# EAGLE board piezo-preamp-tickler_V3-4_single-supply-OPA1642_backup (EAGLE 8.5.0)
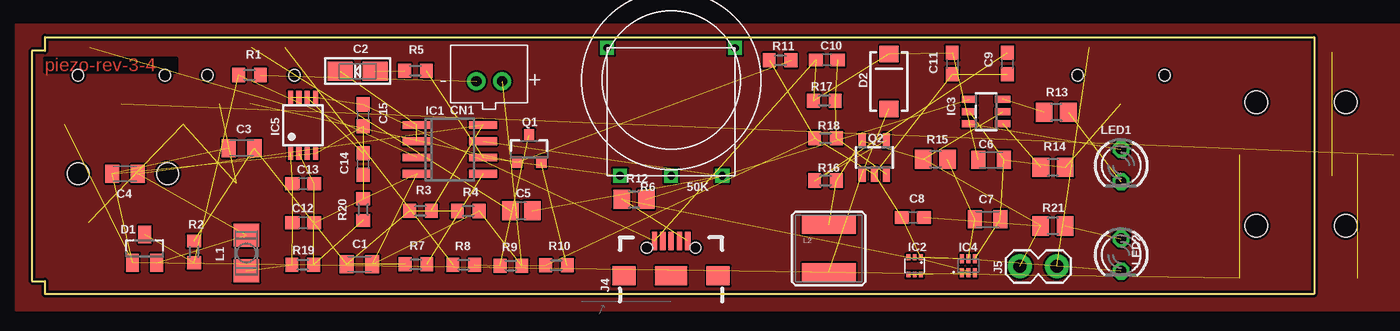
[diagram p0: board, top side]
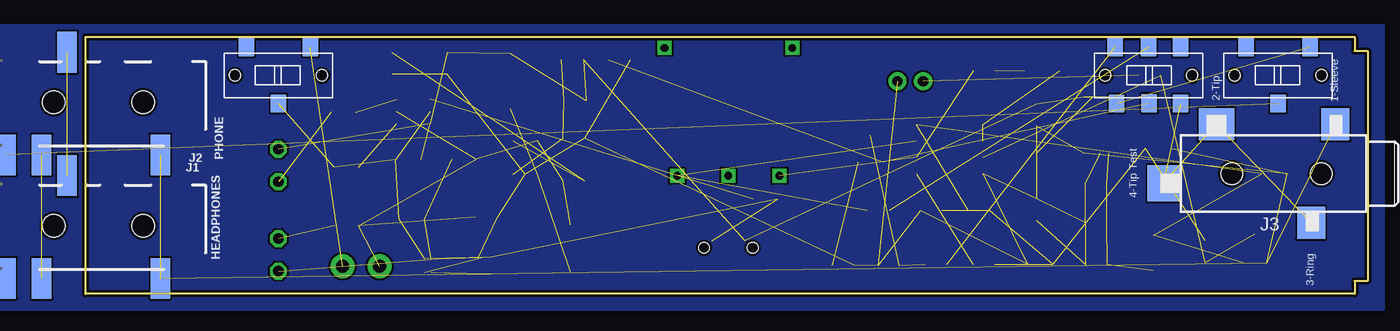
[diagram p1: board, bottom side, seen from below]

Size 100.3 x 20.07 mm. Coordinates in mm from the lower left corner, seen from the top.
Outline: 0,19 0,1 1.02,1 1.02,0 100.3,0 100.3,20.07 1,20.07 1,19 0,19
Copper layers (1*16): Top 0.035mm / dielectric 1.5mm / Bottom 0.035mm
Design rules "default *": minimum track width 6mil, minimum drill 0.35mm, track to track 6mil, track to pad 6mil, pad to pad 6mil, via to via 6mil, smd to smd 6mil, copper to edge 8mil, drill to drill 6mil, minimum pad ring 10mil, minimum via ring 8mil, stop-mask expansion 4mil, vias tented up to drill 20mil, thermal gap 10mil

## Footprints (pad centres in the part's own frame; a part is rotated, then mirrored left to right if it is on the bottom)
C0805K = smd 1.1 x 1.4: 1 -1,0; 2 1,0
EIA3216-18/A-R = smd 1.95 x 1.5: + 1.375,0; - -1.375,0
C0805 = smd 1.3 x 1.5: 1 -0.85,0; 2 0.85,0
C0603 = smd 1.1 x 1: 1 -0.85,0; 2 0.85,0
JST-PH-2-THM = drill 0.8 pad 1.422: 1 1,0; 2 -1,0
SOT23 = smd 1 x 1.4: 1 -0.95,-1.1; 2 0.95,-1.1; 3 0,1.1
SMA-DIODE = smd 1.27 x 1.47: A -2.15,0; C 2.15,0
SO08 = smd 0.6 x 2.2: 1 -1.905,-2.6; 2 -0.635,-2.6; 3 0.635,-2.6; 4 1.905,-2.6; 5 1.905,2.6; 6 0.635,2.6; 7 -0.635,2.6; 8 -1.905,2.6
SOT-563 = smd 0.3 x 0.45: 1 -0.5,-0.675; 2 0,-0.675; 3 0.5,-0.675; 4 0.5,0.675; 5 0,0.675; 6 -0.5,0.675
SOT23-6 = smd 0.55 x 1.2: 1 -0.95,-1.3; 2 0,-1.3; 3 0.95,-1.3; 4 0.95,1.3; 5 0,1.3; 6 -0.95,1.3
WSON-6 = smd 0.3 x 0.7: 1 -0.5,-0.55; 2 0,-0.55; 3 0.5,-0.55; 4 0.5,0.55; 5 0,0.55; 6 -0.5,0.55
MSOP-8 = smd 0.4 x 1: 1 -0.975,-2.2; 2 -0.325,-2.2; 3 0.325,-2.2; 4 0.975,-2.2; 5 0.975,2.2; 6 0.325,2.2; 7 -0.325,2.2; 8 -0.975,2.2
TRRS_SJ-43514-SMT-TR = smd 1.524 x 3.175: EARTH -7.067,-4.128; RING1 -2.309,3.901; RING2 -4.293,-4.128; TIP 4.995,-4.128 | hole 1.778: -3.353,-0.007; 3.647,-0.007
TRS_SJ-3524-SMT = smd 2.5 x 2.2: 1 3.85,-4.6; 3 -3.85,-2.7 | smd 2.5 x 2.8: 2 3.85,4.7 | smd 2.8 x 2.5: 4 -0.75,8.85 | hole 1.7: 0,-3.5; 0,3.5
USB-B-MICRO-SMD_RED_PASTE = smd 1.45 x 0.4: D+ 2.725,0; D- 2.725,0.65; GND 2.725,-1.3; ID 2.725,-0.65; VBUS 2.725,1.3 | smd 1.5 x 1.8: SHIELD1 0,3.685; SHIELD2 0,-3.685 | smd 1.5 x 2.5: SHIELD3 0,0 | hole 0.85: 2.2,1.9; 2.2,-1.9
1X02_LOCK = drill 1.016 pad 1.88: 1 -0.178,0; 2 2.718,0
L3225P = smd 1.8 x 2: 1 -1.4,0; 2 1.4,0
CR54 = smd 4.2 x 1.4: P$1 0,1.85; P$2 0,-1.85
LED3MM = drill 0.813 octagon: A -1.27,0; K 1.27,0
SOT23-3 = smd 0.8 x 0.9: 1 -0.95,-1; 2 0.95,-1; 3 0,1.1
SOT23-5 = smd 0.55 x 1.2: 1 -0.95,-1.3; 2 0,-1.3; 3 0.95,-1.3; 4 0.95,1.3; 5 -0.95,1.3
R0603 = smd 1 x 1.1: 1 -0.85,0; 2 0.85,0
POT-THUMB-14MM_ALPHA-RV100F-30-4K1B-B10K-B301 = drill 0.6 square: P$1 -4,-7.5; P$2 0,-7.5; P$3 4,-7.5; P$4 -5,2.5; P$5 5,2.5
R0805 = smd 1.3 x 1.5: 1 -0.95,0; 2 0.95,0
SWITCH_DPDT_CL-SB-22B = smd 1.2 x 1.4: 1 -2.5,-2.2; 2 0.05,-2.17; 3 2.5,-2.2; 4 -2.63,2.2; 5 0,2.2; 6 2.51,2.2 | hole 0.9: -3.4,0; 3.4,0
SWITCH_SPDT_CL-SB-12B = smd 1.2 x 1.4: P$1 -2.5,-2.2; P$2 0,2.2; P$3 2.5,-2.2 | hole 0.9: -3.4,0; 3.4,0

## Placement (x,y rotation side)
C1  10uF  [C0805K]  25.62,2.31 0 top
C2  100uF  [EIA3216-18/A-R]  25.48,17.41 180 top
C3  0.1uF  [C0805K]  16.4,11.4 180 top
C4  0.1uF  [C0805K]  7.29,9.38 180 top
C5  10uF  [C0805]  38.28,6.5 180 top
C6  10uF  [C0805K]  75.04,10.47 0 top
C7  0.1uF  [C0805K]  74.77,5.82 0 top
C8  10uF  [C0603]  68.91,5.97 180 top
C9  56nf  [C0603]  76.31,18 270 top
C10  2.2pf  [C0603]  62.18,18.29 0 top
C11  68uF  [C0603]  71.99,18 270 top
C12  10uF  [C0603]  21.23,5.56 0 top
C13  10nF  [C0603]  21.23,8.6 0 top
C14  10nF  [C0603]  25.91,10.14 270 top
C15  10uF  [C0603]  25.91,13.95 270 top
CN1  [JST-PH-2-THM]  35.77,16.62 0 top
D1  BAT54S  [SOT23]  8.81,3.54 0 top
D2  10BQ015  [SMA-DIODE]  67.04,16.61 90 top
IC1  OPA1642  [SO08]  32.68,11.3 270 top
IC2  DMN2400  [SOT-563]  69.06,2.19 180 top
IC3  BQ21040  [SOT23-6]  74.64,14.25 90 top
IC4  BQ297X  [WSON-6]  73.25,2.19 0 top
IC5  TPS7A49  [MSOP-8]  21.21,13.18 0 top
J1  HEADPHONES  [TRRS_SJ-43514-SMT-TR]  99.43,5.33 0 bottom
J2  PHONE  [TRRS_SJ-43514-SMT-TR]  99.43,14.99 0 bottom
J3  Mixer  [TRS_SJ-3524-SMT]  7.11,9.4 90 bottom
J4  [USB-B-MICRO-SMD_RED_PASTE]  50,1.41 90 top
J5  Battery  [1X02_LOCK]  77.47,2.15 0 top
L1  100uH  [L3225P]  16.78,3.19 90 top
L2  2.7uH  [CR54]  62.34,3.56 0 top
LED1  [LED3MM]  85.2,10.03 270 top
LED2  [LED3MM]  85.2,3.05 270 top
Q1  MMBFJ201  [SOT23-3]  38.9,11.3 0 top
Q2  SC4503  [SOT23-5]  65.9,10.67 0 top
R1  100K  [R0603]  17.03,17.11 180 top
R2  10M  [R0603]  12.68,3.28 270 top
R3  100K  [R0603]  30.39,6.48 0 top
R4  100K  [R0603]  34.13,6.48 180 top
R5  220  [R0603]  30,17.44 0 top
R6  50K  [POT-THUMB-14MM_ALPHA-RV100F-30-4K1B-B10K-B301]  50,16.73 0 top
R7  220  [R0603]  30.04,2.31 180 top
R8  1K  [R0603]  33.78,2.26 180 top
R9  1M  [R0603]  37.47,2.2 180 top
R10  1.2K  [R0603]  41.02,2.24 0 top
R11  2.2K  [R0603]  58.53,18.26 0 top
R12  10k  [R0805]  47.09,7.39 0 top
R13  1k  [R0805]  80.12,14.19 180 top
R14  10k  [R0805]  79.88,9.88 180 top
R15  330  [R0805]  70.68,10.53 0 top
R16  15k  [R0603]  62.09,8.86 0 top
R17  1M  [R0603]  61.99,15.11 180 top
R18  100k  [R0603]  62.09,12.16 0 top
R19  91.2k  [R0603]  21.19,2.27 0 top
R20  100k  [R0603]  25.91,6.59 90 top
R21  390  [R0805]  79.87,5.3 180 top
SW1  SWITCH_DPDT  [SWITCH_DPDT_CL-SB-22B]  17.13,17.08 0 bottom
SW2  INPUT-select  [SWITCH_SPDT_CL-SB-12B]  7,17.08 180 bottom
SW3  SPDT  [SWITCH_SPDT_CL-SB-12B]  85.2,17.08 180 bottom

## Library data of the parts
C1 C3-C15 CN1 = adafruit
C2 = microbuilder
D1 = diode
D2 = SparkFun
IC1 = linear
IC2-IC5 J1-J3 Q1 Q2 R1-R21 SW1-SW3 = CMU-ArtFab
J4 = SparkFun-Connectors; PROD_ID: CONN-11752
J5 = SparkFun-Connectors; G: -; V: +
L1 = rcl; SPICEPREFIX: L
L2 = SparkFun-Passives
LED1 LED2 = led

## Nets
+12V: C12.1 C13.1 IC5.1 L1.1 R19.1
GND: C1.2 C3.2 C4.2 C8.2 C9.2 C11.2 C12.2 C14.2 C15.2 CN1.1 D1.1 IC1.4 IC2.1 IC4.6 IC5.4 J1.TIP J2.TIP J3.1 LED2.K Q2.2 R4.1 R9.1 R10.1 R11.1 R18.1 R20.2
GND2: C6.2 C7.2 IC2.3 IC3.5 IC4.4 J4.GND R12.1 R14.1 SW3.P$2
N$2: CN1.2 R1.1
N$3: Q1.2 R10.2
N$4: J1.EARTH
N$5: IC1.5 R7.1
N$6: C5.1 IC1.7 R6.P$3
N$7: IC1.6 R5.2 R6.P$1
N$9: D1.3 IC1.3 R1.2 R2.2
N$10: Q1.3 R8.1 R9.2
N$11: R8.2 SW1.4
N$12: J3.2 J3.3 J3.4 SW1.3
N$13: J1.RING1 J2.RING1
N$14: C2.- R5.1
N$15: J1.RING2 J2.RING2
N$16: C5.2 SW1.5
N$17: J2.EARTH SW2.P$2
N$18: LED2.A R21.1
N$19: SW1.1 SW2.P$1
N$20: J5.2 SW3.P$1
N$22: LED1.K R13.1
N$23: C1.1 C3.1 R2.1 R3.1 R4.2 R7.2
N$24: C2.+ IC1.1 IC1.2
N$25: C4.1 D1.2 IC1.8 L1.2 R3.2
N$26: C13.2 IC5.2 R19.2 R20.1
N$27: IC3.3 R13.2
N$28: C14.1 IC5.6
N$29: C9.1 Q2.4 R16.1
N$30: C10.2 Q2.3 R17.1 R18.2
N$31: IC3.1 R14.2
N$32: D2.A L2.P$2 Q2.1
N$36: IC3.4 R12.2
N$42: C7.1 IC4.5 R15.2
N$43: IC2.4 IC2.6
N$44: IC2.5 IC4.2
N$45: IC2.2 IC4.3
SELECT: Q1.1 R11.2 SW1.2
V+: C6.1 C10.1 C11.1 C15.1 D2.C IC3.6 IC5.5 IC5.8 J4.VBUS LED1.A R17.2
VBAT: C8.1 IC3.2 J5.1 L2.P$1 Q2.5 R15.1 R16.2 R21.2

## Tracks (layer width: path | path; a pad name or v marks a point on that pad's centre or on a via)
+12V  (4 unrouted)
GND  (25 unrouted)
GND2  (8 unrouted)
N$2  (1 unrouted)
N$3  (1 unrouted)
N$4
  pour Top: -1.27,21.05 -1.27,-1.27 115.57,-1.27 115.57,21.05
N$5  (1 unrouted)
N$6  (2 unrouted)
N$7  (2 unrouted)
N$8
  pour Bottom: -1.27,21.05 -1.27,-1.27 115.57,-1.27 115.57,21.05
N$9  (3 unrouted)
N$10  (2 unrouted)
N$11  (1 unrouted)
N$12  (3 unrouted)
N$13  (1 unrouted)
N$14  (1 unrouted)
N$15  (1 unrouted)
N$16  (1 unrouted)
N$17  (1 unrouted)
N$18  (1 unrouted)
N$19  (1 unrouted)
N$20  (1 unrouted)
N$22  (1 unrouted)
N$23  (5 unrouted)
N$24  (2 unrouted)
N$25  (4 unrouted)
N$26  (3 unrouted)
N$27  (1 unrouted)
N$28  (1 unrouted)
N$29  (2 unrouted)
N$30  (3 unrouted)
N$31  (1 unrouted)
N$32  (2 unrouted)
N$36  (1 unrouted)
N$42  (2 unrouted)
N$43  (1 unrouted)
N$44  (1 unrouted)
N$45  (1 unrouted)
SELECT  (2 unrouted)
V+  (10 unrouted)
VBAT  (7 unrouted)

## Text on the board
Top: piezo-rev-3-4